# Altium PCB 搅拌杯PCB.PcbDoc
Units mil, origin at the board's own origin, x right, y up, seen from the top; angles counter-clockwise.
Board outline 1417.32 x 1279.53 mil, 2 copper layers (Top Layer, Bottom Layer); 74 components, 45 nets, 179 pads, 40 vias.
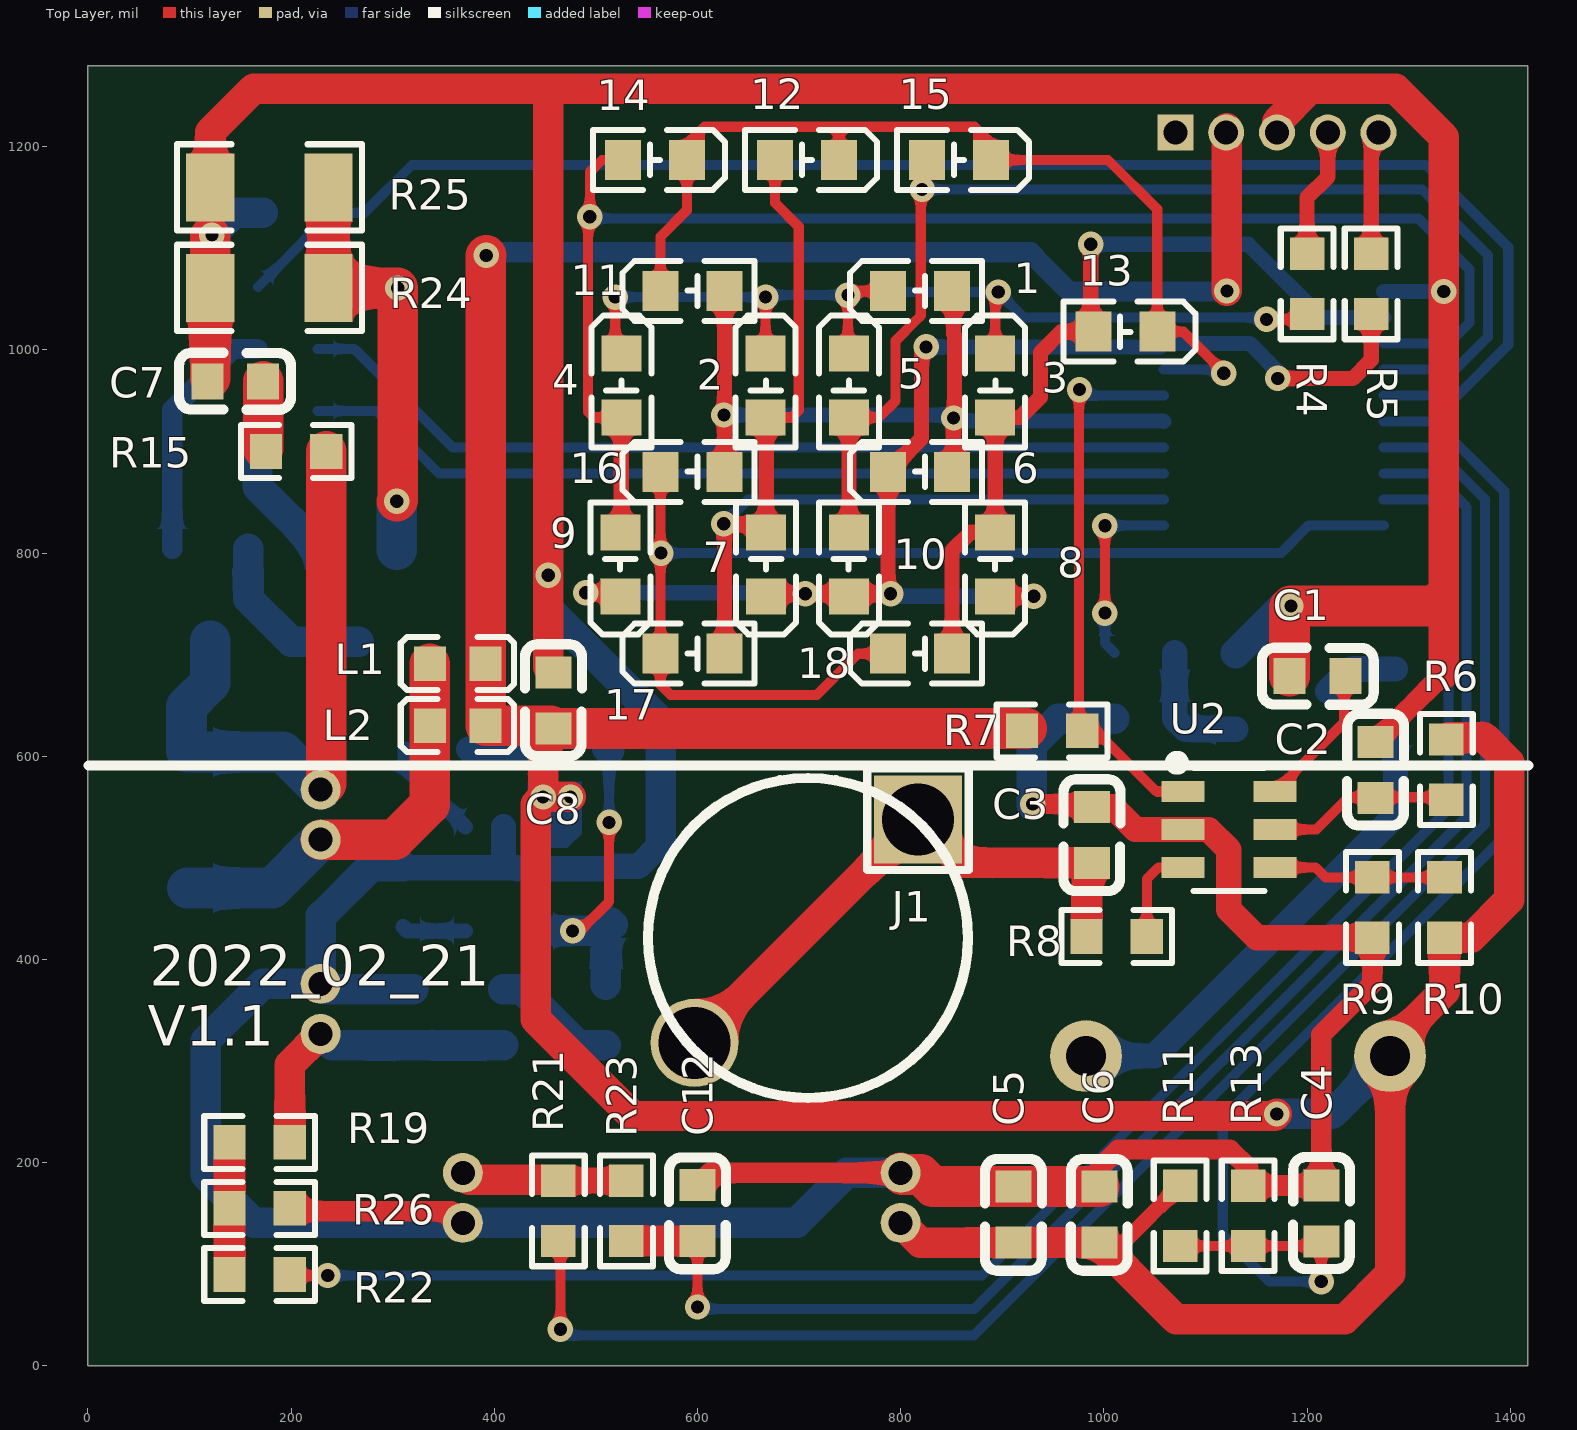
[diagram p0: Top Layer view]
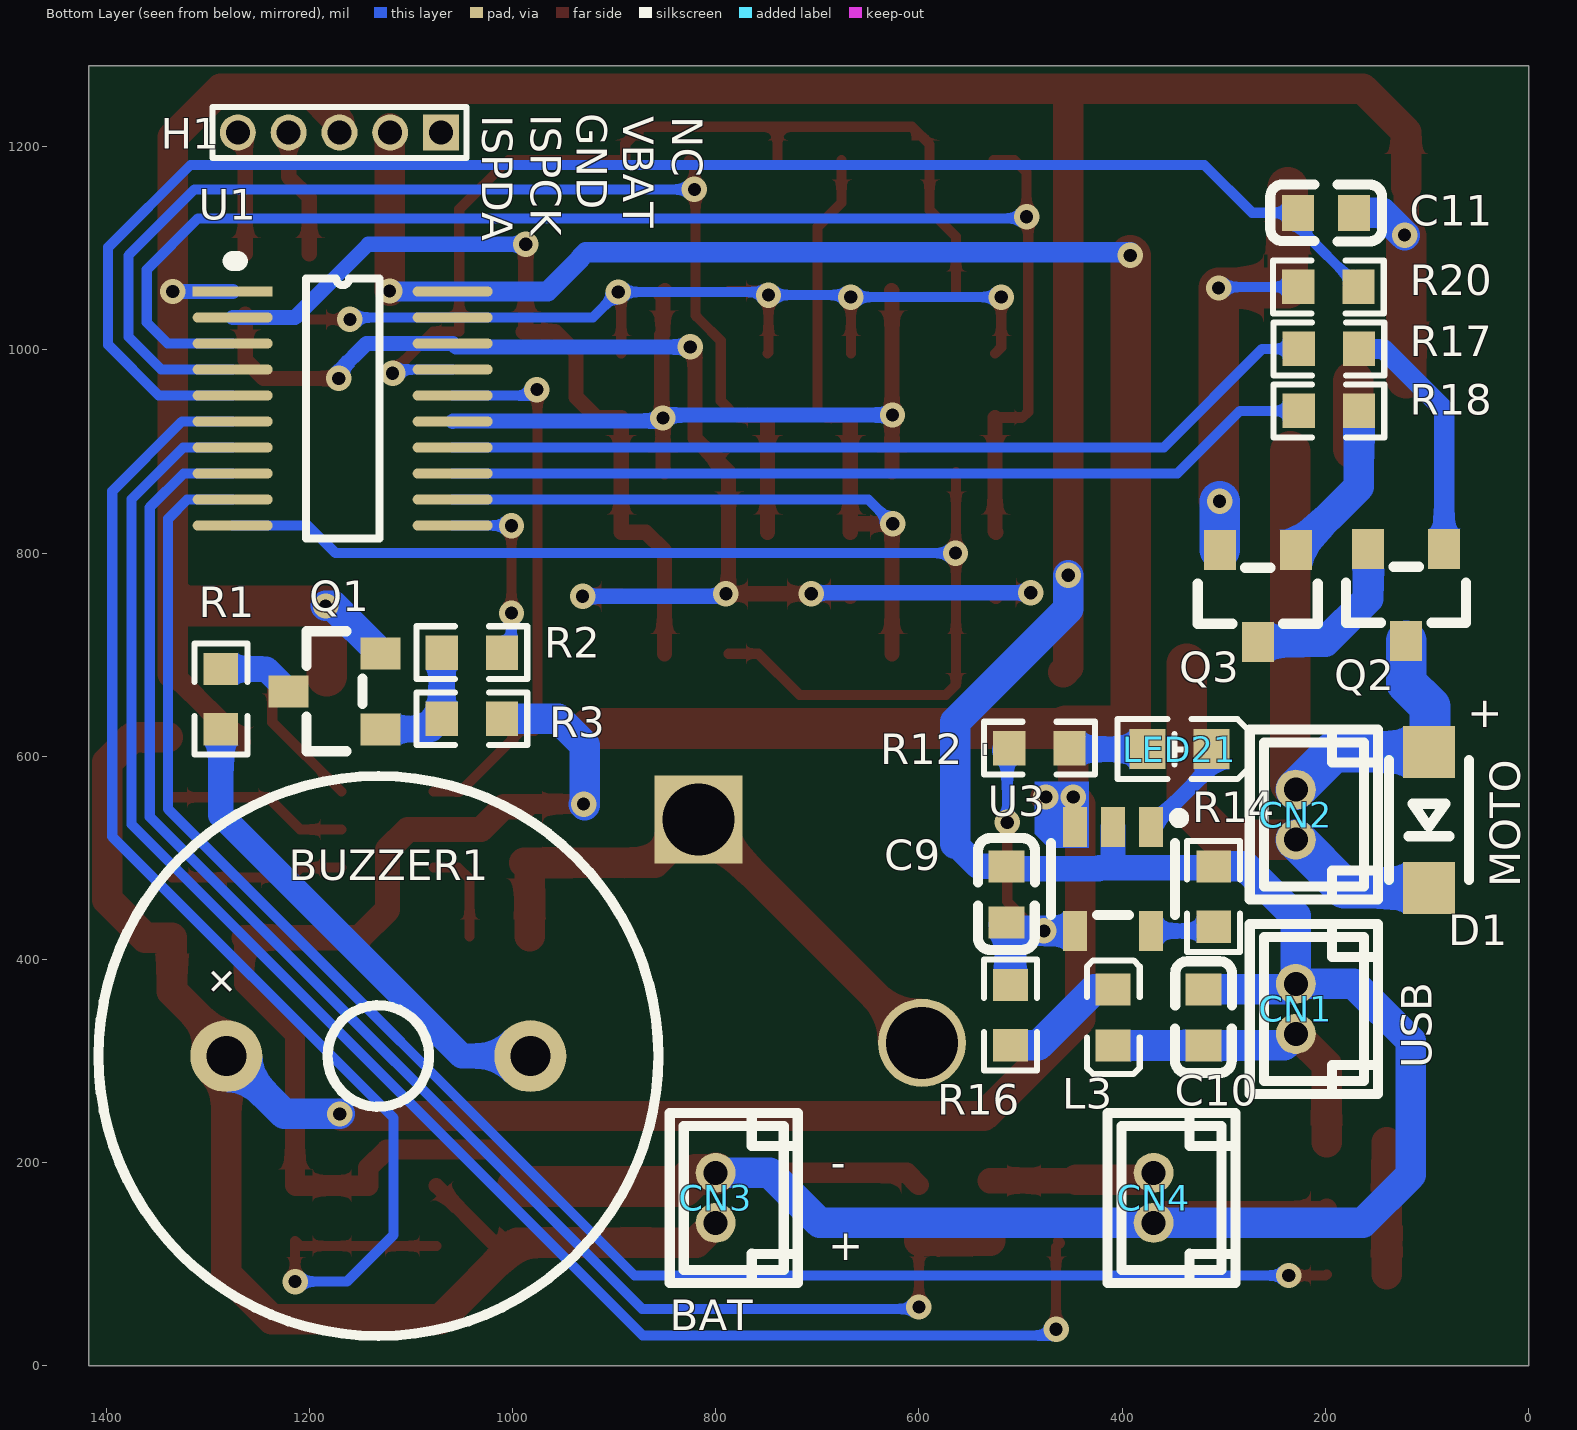
[diagram p1: Bottom Layer view, seen from below]

## Layer stack, top to bottom
Top Solder: solder mask 0.4, Solder Resist, Dk 3.5
Top Layer: signal copper 1.4
Dielectric 1: dielectric 12.6, FR-4, Dk 4.8
Bottom Layer: signal copper 1.4
Bottom Solder: solder mask 0.4, Solder Resist, Dk 3.5

## Board outline
0,0 0,1279.53 1417.32,1279.53 1417.32,0

## Design rules (kind name [scope] priority, off if disabled: settings)
Clearance [All] p1: gap=8
ComponentClearance [All] p1 off: gap=10 collisioncheckmode=3 verticalgap=10 showdistances=FALSE
PolygonConnect [All] p1: connectstyle=Relief reliefconductorwidth=10 reliefentries=4 polygonreliefangle="90 Angle" airgapwidth=10
RoutingVias [All] p1: holewidth=28 width=50 viastyle="Through Hole" minholewidth=10 minwidth=10 maxholewidth=28 maxwidth=50
SolderMaskExpansion [All] p1: expansion=4
Width [All] p1: maxlimit=50 minlimit=8 preferedwidth=10
29 further rules are at their usual default settings.

## Components (designator, comment, footprint, x,y, rotation, side; value= is the part's Value field where it differs from the comment)
1 "LED-0603_W" LED0603-FD_WHITE 819,1058 r180 top (schematic designator LED1)
2 "LED-0603_W" LED0603-FD_WHITE 667,965 r90 top (schematic designator LED2)
3 "LED-0603_W" LED0603-FD_WHITE 893,965 r90 top (schematic designator LED3)
4 "LED-0603_W" LED0603-FD_WHITE 525,965 r90 top (schematic designator LED4)
5 "LED-0603_W" LED0603-FD_WHITE 749,965 r90 top (schematic designator LED5)
6 "LED-0603_W" LED0603-FD_WHITE 819,880 r180 top (schematic designator LED6)
7 "LED-0603_W" LED0603-FD_WHITE 667.53,789 r270 top (schematic designator LED7)
8 "LED-0603_W" LED0603-FD_WHITE 893,789 r270 top (schematic designator LED8)
9 "LED-0603_W" LED0603-FD_WHITE 524,789 r270 top (schematic designator LED9)
10 "LED-0603_W" LED0603-FD_WHITE 749,789 r270 top (schematic designator LED10)
11 "LED-0603_W" LED0603-FD_WHITE 595,1058 r180 top (schematic designator LED11)
12 "LED-0603_W" LED0603-FD_WHITE 707.75,1187 r0 top (schematic designator LED12)
13 "LED-0603_W" LED0603-FD_WHITE 1021,1018 r0 top (schematic designator LED13)
14 "LED-0603_W" LED0603-FD_WHITE 558,1187 r0 top (schematic designator LED14)
15 "LED-0603_W" LED0603-FD_WHITE 857.51,1187 r0 top (schematic designator LED15)
16 "LED-0603_W" LED0603-FD_WHITE 595,880 r180 top (schematic designator LED16)
17 "LED-0603_W" LED0603-FD_WHITE 595,701 r180 top (schematic designator LED17)
18 "LED-0603_W" LED0603-FD_WHITE 819,701 r180 top (schematic designator LED18)
BUZZER1 "FMQ-BUZZER2" BUZ-TH_BD12.0-P7.60-D0.6-FD 1132,305 r180 bottom
C1 "4.7nF" C0603 1210.24,678.92 r180 top
C2 "0.1u" C0603 1267.24,586.54 r270 top
C3 "nc" C0603 988.22,522.69 r90 top
C4 "0.1u" C0603 1214,150.23 r270 top
C5 "1uF" C0603 911,149 r90 top
C6 "0.1u" C0603 995.5,149 r90 top
C7 "0.1u" C0603 145,969 r0 top
C8 "10uF" C0603 458,655 r270 top
C9 "4.7uF" C0603 514,464.19 r270 bottom
C10 "10uF" C0603 320,343 r270 bottom
C11 "0.1u" C0603 199.44,1135 r0 bottom
C12 "0.1u" C0603 600,150.44 r90 top
CN1 "0530470210" CONN-TH_0530470210 229,351.39 r90 bottom
CN2 "0530470210" CONN-TH_0530470210 229,542.61 r90 bottom
CN3 "0530470210" CONN-TH_0530470210 800,165.39 r90 bottom
CN4 "0530470210" CONN-TH_0530470210 369,165.39 r90 bottom
D1 "1N4148W" SOD-123FL_L2.6-W1.6-LS3.4-RD 98,537.33 r270 bottom
H1 "HDR-F-2.54_1x5" 1.27mm_5PIN 1070.34,1214 r0 bottom
J1 "HDR-M-2.54_1x1" HDR-M-2.54_1X1 817,538 r0 top
L1 "22uH" L0603 364,691 r0 top
L2 "22uH" L0603 364,629.97 r0 top
L3 "BEAD" L0603 409,343 r270 bottom
LED21 "LED-0603_W" LED0603-FD_WHITE 343.5,607 r180 bottom
Q1 "2N7002" SOT-23_L2.9-W1.3-P0.95-LS2.4-BR 1175.07,664.01 r180 bottom
Q2 "2N7002" SOT-23_L2.9-W1.3-P0.95-LS2.4-BR 120.43,759 r90 bottom
Q3 "2N7002" SOT-23_L2.9-W1.3-P0.95-LS2.4-BR 266.43,758 r90 bottom
R1 "100R" R0603 1287,656.35 r90 bottom
R2 "1K" R0603 1040.07,702.01 r180 bottom
R3 "100K" R0603 1040.07,637.01 r180 bottom
R4 "100R" R0603 1200,1065 r270 top
R5 "100R" R0603 1263,1065 r270 top
R6 "0R" R0603 1337,587 r90 top
R7 "10K" R0603 949,625 r180 top
R8 "1K" R0603 1012.58,422.69 r180 top
R9 "NC" R0603 1264.24,451.21 r90 top
R10 "NC" R0603 1335.24,451.21 r90 top
R11 "3M" R0603 1075,147.69 r90 top
R12 "1k" R0603 481.35,608 r180 bottom
R13 "1M" R0603 1142,147.79 r270 top
R14 "1k" R0603 310,462 r90 bottom
R15 "1k" R0603 205,900 r0 top
R16 "NC" R0603 509.84,345.35 r270 bottom
R17 "100R" R0603 196.55,1001 r180 bottom
R18 "100R" R0603 196.55,940 r180 bottom
R19 "1k" R0603 169,220 r0 top
R20 "1k" R0603 197,1062 r180 bottom
R21 "330K" R0603 463,152.64 r90 top
R22 "1k" R0603 169,90 r0 top
R23 "1k" R0603 530,152.64 r270 top
R24 "1R" R1206 178.65,1061 r0 top
R25 "1R" R1206 178.65,1160 r0 top
R26 "33K" R0603 169,155 r0 top
U1 "ES7P0693FHTF" TSOP20 1275.4,1057.54 r180 bottom
U2 "AS01C(AI01)" SOT-23-6_L2.9-W1.6-P0.95-LS2.8-BL 1123.11,528 r270 top
U3 "HE4054B" SOT-23-5_L3.0-W1.7-P0.95-LS2.8-BR 409,479.34 r90 bottom

## Footprints (in the part's own frame and the unit in brackets; to place one, negate y for a bottom-side part, rotate by r counter-clockwise, add the part's x,y. Pads: shape width x height; smd on the part's side, far side on the other; paste and mask are expansions set on the pad)
1.27mm_5PIN [mm]
  rect 0.9x0.9 hole 0.6: 1(0,0)
  round 0.9 hole 0.6: 2(1.27,0) 3(2.54,0) 4(3.81,0) 5(5.08,0)
  silkscreen extent -0.64,-0.64 5.71,0.64
BUZ-TH_BD12.0-P7.60-D0.6-FD [mm]
  round 1.8 hole 1: 1(-3.8,0) 2(3.8,0)
  silkscreen extent -7,-7 7,7
C0603 [mm]
  rect 0.8x0.9 smd: 1(-0.7,0) 2(0.7,0)
  silkscreen extent -1.41,-0.71 1.39,0.72
CONN-TH_0530470210 [mm]
  round 1 hole 0.6: 1(-0.625,0) 2(0.625,0)
  silkscreen extent -2.13,-2.05 2.13,1.15
HDR-M-2.54_1X1 [mm]
  rect 2.2x2.2 hole 1.8: 1(0,0)
  silkscreen extent -1.27,-1.27 1.27,1.27
L0603 [mm]
  rect 0.8x0.864 smd: 1(-0.7,0) 2(0.7,0)
  silkscreen extent -1.42,-0.65 1.41,0.67
LED0603-FD_WHITE [mm]
  rect 0.9x1 smd: 1(-0.8,0) 2(0.8,0)
  silkscreen extent -1.55,-0.75 1.75,0.75
R0603 [mil]
  rect 31.75x34.02 smd: 1(-29.65,0) 2(29.65,0)
  silkscreen extent -55,-26 55,26
R1206 [mil]
  rect 47.54x66.97 smd: 1(-58.22,0) 2(58.22,0)
  silkscreen extent -91,-42 91,42
SOD-123FL_L2.6-W1.6-LS3.4-RD [mm]
  rect 1.3x1.3 smd: 1(1.7,0) 2(-1.7,0)
  silkscreen extent -1.5,-1 1.5,1
SOT-23-5_L3.0-W1.7-P0.95-LS2.8-BR [mm]
  rect 1x0.6 smd: 1(1.3,-0.95) 2(1.3,0) 3(1.3,0.95) 4(-1.3,0.95) 5(-1.3,-0.95)
  silkscreen extent -0.9,-1.78 1.65,1.55
SOT-23-6_L2.9-W1.6-P0.95-LS2.8-BL [mm]
  rect 0.532x1.072 smd: 1(-0.95,-1.149) 2(0,-1.149) 3(0.95,-1.149) 4(0.95,1.149) 5(0,1.149) 6(-0.95,1.149)
  silkscreen extent -1.82,-1.45 1.54,0.89
SOT-23_L2.9-W1.3-P0.95-LS2.4-BR [mm]
  rect 1x0.8 smd: 1(1.15,-0.95) 2(1.15,0.95) 3(-1.15,0)
  silkscreen extent -0.7,-1.5 0.7,1.5
TSOP20 [mm]
  rect 2x0.25 smd: 1(0,0)
  oval 2x0.25 smd: 2(0,-0.65) 3(0,-1.3) 4(0,-1.95) 5(0,-2.6) 6(0,-3.25) 7(0,-3.9) 8(0,-4.55) 9(0,-5.2) 10(0,-5.85) 11(5.5,-5.85) 12(5.5,-5.2) 13(5.5,-4.55) 14(5.5,-3.9) 15(5.5,-3.25) 16(5.5,-2.6) 17(5.5,-1.95) 18(5.5,-1.3) 19(5.5,-0.65) 20(5.5,0)
  silkscreen extent 0,-6.18 3.66,0.76

## Part data
L3: library part 22uH
R3: library part 1K
R6 R7: library part NC
R11: library part 430k
R13: library part 430K
R21: library part 33K

## Free pads (board coordinates)
  round 86.61 hole 70.87: 0(597,318)

## Via types
v1: diameter 25, hole 13, Top Layer to Bottom Layer, tented both sides, 40 vias

## Nets (pads, with @x,y where several pads share a name; then routed paths per layer and width w, separated by ;. In a path a pad name is that pad's centre, name@x,y a point inside that pad or via, vN(x,y) a via of type N, cw(c..) or ccw(c..) an arc to the next point about the centre after c; other vN are vias at no path point)
BUZZER: R2.2 U1.11 | length 186.8
  Top Layer w10: v1(1001,741) v1(1001,827)
  Bottom Layer w10: v1(1001,741) 1001,711.42 R2.2 ; v1(1001,827) 1001.22,827.22 U1.11
GND: C1.2 C2.1 C3.2 C4.1 C5.2 C6.2 C7.1 C8.1 C9.1 C10.1 C11.1 C12.2 CN1.2 CN3.2 CN4.1 H1.3 Q1.2 R3.2 R9.1 R13.1 R14.2 R24.1 R25.1 R26.2 U1.1 U2.2 U3.2 | length 6715.9
  Top Layer w20: R26.2 198.65,152.32 357.46,152.32 CN4.1 ; C12.2 612,190 CN3.2 ; v1(930,553) 985.46,553 C3.2 ; C6.2 995.5,194.5 1014,213 1124,213 1142,195 R13.1 1213.66,177.44 C4.1 1214,326 1264.24,376.24 R9.1 ; C2.1 1334.46,681.32
  Top Layer w25: C7.1 C7.1@120.43,971.99 ; v1@120.43,1113 R25.1 ; C3.2 1008.76,550.24 1031,528 U2.2 1103,528 1123,508 1123,449 1150.44,421.56 R9.1
  Top Layer w30: R25.1 120.43,1214.43 163,1257 1203,1257 ; 453,1256 v1(453,778.2) 453,687.56 C8.1 ; H1.3 1170.34,1224.34 1203,1257 ; 1329,752 1334.46,752 ; 1334.46,681.32 1334.46,752 ; 1203,1257 1287,1257 1334.46,1209.54 v1(1334.46,1057.54) 1334.46,752
  Top Layer w40: C7.1@120.43,971.99 R24.1 v1@120.43,1112 ; CN3.2 801.54,188.46 819.75,188.46 831.66,176.56 C6.2 ; C1.2 1182.68,746.68 v1(1184,748) 1325,748 1329,752
  Bottom Layer w15: U1.1 v1(1334.46,1057.54)
  Bottom Layer w25: R14.2@310,490.33 422.35,490.33 423.18,489.5 511.75,489.5 C9.1 541.75,491.75 564,514 ; 409,502 U3.2
  Bottom Layer w30: v1(122,1113) 144,1135 C11.1 ; R14.2 278.65,491.65 230,443 229,443 CN1.2 ; C10.1 234.44,370.56 CN1.2 ; v1(453,778.2) 453,745 564,634 564,514 ; CN3.2 747,190 697.78,140.78 CN4.1 163.22,140.78 116,188 116,320 172,376 CN1.2 ; v1(930,553) 929,552 929,611 955.01,637.01 R3.2 ; Q1.2 1176.38,748 v1(1184,748)
IO_OUT: R21.1 U1.7 | length 1651
  Top Layer w10: R21.1 461,120.98 465,116.98 v1(465,36)
  Bottom Layer w10: v1(465,36) 471,30 871.91,30 1375,533.09 1375,853 1324,904 U1.7
ISPCK: H1.4 R4.1 | length 127.8
  Top Layer w15: R4.1 1200,1150 1220.34,1170.34 H1.4
ISPDA: H1.5 R5.1 | length 122.4
  Top Layer w15: R5.1 1263,1206.66 H1.5
LED_IO_0: 1.2 2.2 3.2 4.2 5.2 R4.2 U1.19 | length 980.3
  Top Layer w10: v1(519,1052) 519,1002.49 4.2 ; 2.2 v1(667,1052) ; 5.2 748,997.49 v1(748,1054) 752,1058 1.2 ; 3.2 893,1054 v1(896,1057) ; v1(1160,1030) 1202.98,1030 R4.2@1204.93,1031.95
  Bottom Layer w10: v1(519,1052) v1(667,1052) 669,1054 v1(748,1054) 745,1057 v1(896,1057) 921.05,1031.95 U1.19 1158.05,1031.95 v1(1160,1030)
LED_IO_1: 6.2 7.2 8.2 9.2 10.2 R5.2 U1.18 | length 1333.8
  Top Layer w15: v1(490,761) 525.49,761 526.49,760 9.2 ; 7.2 670.02,760 v1(706,760) v1@787.51,760 ; 6.2 v1@787.51,760 ; 6.2@789,881.49 820.5,912.99 820.5,999.5 822,998 826,1002 v1(825,1003) ; v1(790,760) v1@787.51,760 ; 8.2 v1(931,757.51) ; v1(1171,972) 1245,972 1263,990 R5.2
  Bottom Layer w15: v1(490,761) 705,761 v1(706,760) ; v1(790,760) 792.49,757.51 v1(931,757.51) ; v1@823.36,1003.08 824.28,1004 825,1003.28 v1(825,1003) 1055.5,1003 U1.18 1143.64,1006.36 1171,979 v1(1171,972)
LED_IO_2: 11.2 12.2 13.2 14.2 15.2 U1.17 | length 963.6
  Top Layer w10: 11.2 563.51,1111.51 589.49,1137.49 14.2 589.49,1202.18 607,1219.69 739.25,1219.69 ; 12.2 739.25,1219.69 ; v1(1118,977) 1118,978 1078,1018 13.2 1052.49,1138.51 1004,1187 15.2 889,1203 872.31,1219.69 739.25,1219.69
  Bottom Layer w10: U1.17 v1@1118,980.77
LED_IO_3: 16.2 17.2 18.2 U1.10 | length 1177.1
  Top Layer w10: 16.2 17.2 563.51,670.49 573.56,660.44 717.44,660.44 758,701 18.2
  Bottom Layer w10: v1(564,800) 1174,800 1201.22,827.22 U1.10
LED_IO_4: 1.1 6.1 11.1 16.1 U1.15 | length 808.2
  Top Layer w15: 16.1 11.1 11.1@627,1058.5 ; 1.1@850,1058.5 1.1 854,1054.5 852,1052.5 852,1015.6 853,1014.6 853,934 v1(852,933) ; 6.1 852,881.5 v1(852,933) ; v1@852,935 v1(852,933)
  Bottom Layer w15: v1(626,936) v1@852,936 ; v1(852,933) v1@852,936 ; U1.15 1058.45,930 851,930 849,932 849,933 v1@852,936
LED_IO_5: 2.1 7.1 12.1 17.1 U1.12 | length 1009.1
  Top Layer w10: 2.1 692.5,933.5 699.68,940.68 699.68,1121.32 676.26,1144.74 12.1
  Top Layer w15: v1(625.82,828.82) v1@626.5,828.82 ; 17.1 v1@626.5,828.82 ; 7.1@659.21,828.82 v1@626.5,828.82 ; 2.1 667.53,932.97 7.1
  Bottom Layer w10: v1(625.82,828.82) 649.82,852.82 U1.12
LED_IO_6: 3.1 8.1 13.1 18.1 U1.2 | length 826
  Top Layer w15: 18.1 850.5,802.5 868.5,820.5 8.1 3.1 917.5,933.5 937.5,953.5 937.5,997.5 958,1018 13.1@987,1018 ; v1(987,1104) 13.1@987,1018 ; 13.1 13.1@987,1018
  Bottom Layer w15: v1(987,1104) 1142,1104 1214.05,1031.95 U1.2
LED_IO_7: 4.1 9.1 14.1 U1.3 | length 1461.8
  Top Layer w10: 4.1 498,933.5 492.31,939.19 492.31,1129.31 v1(494,1131) 494,1175 506,1187 14.1
  Top Layer w15: 9.1 525,821.49 4.1
  Bottom Layer w10: v1@490,1130 491,1131 v1(494,1131) ; v1@493.31,1133 494,1132.31 v1(494,1131) ; U1.3 1339.36,1006.36 1359.96,1026.96 1359.96,1079.04 1309.5,1129.5 495.5,1129.5 v1(494,1131)
LED_IO_8: 5.1 10.1 15.1 U1.4 | length 1195.6
  Top Layer w10: 5.1 778.5,933.5 795,950 795,1009.06 815.44,1029.5 815.5,1029.5 819.78,1033.78 819.78,1156.78 v1(821,1158) 821,1181.99 15.1
  Top Layer w15: 10.1 5.1
  Bottom Layer w10: v1(821,1158) 1313,1158 1377.96,1093.04 1377.96,1012.96 1345.77,980.77 U1.4
MOTO_CONTROL_A: R17.1 U1.14 | length 872.8
  Bottom Layer w10: R17.1 262,1001 359,904 U1.14
MOTO_CONTROL_B: R18.1 U1.13 | length 858.2
  Bottom Layer w10: R18.1 284,940 345.59,878.41 U1.13
MOTO_CURRERN: C11.2 R20.2 U1.5 | length 1561
  Bottom Layer w10: R20.2 227,1121.66 C11.2 272,1135 319,1182 1317,1182 1398,1101 1398,1005 1348.18,955.18 U1.5
NetBUZZER1_2: BUZZER1.2 R1.1 | length 487.5
  Bottom Layer w25: BUZZER1.2 1050,305 1287,542 R1.1
NetC1_1: C1.1 U2.6 | length 143
  Top Layer w10: U2.6 1236.52,633.58 1236.52,678.92 C1.1
NetC2_2: C2.2 R6.1 U2.5 | length 184
  Top Layer w10: U2.5 1209,528 1240.69,559.69 R6.1@1339.24,559.69
NetC3_1: C3.1 J1.1 pad.0 R8.2 | length 574.7
  Top Layer w30: pad.0 J1.1 859.87,495.13 C3.1 982.93,489.84 R8.2
NetC7_2: C7.2 R15.1 | length 70.2
  Top Layer w30: R15.1@172.56,902.79 R15.1
  Top Layer w40: R15.1@172.56,902.79 C7.2
NetC9_2: C9.2 R12.1 R16.1 U3.4 | length 328.8
  Top Layer w10: v1(477,428.16) 484.16,428.16 513,457 v1(513,535)
  Bottom Layer w10: v1(513,535) R12.1@513,606
  Bottom Layer w30: U3.4@455,428.16 v1(477,428.16) 505.52,428.16 C9.2@509.84,432.48 ; R16.1 C9.2@509.84,432.48 ; R12.1 R12.1@513,606 ; C9.2@509.84,432.48 C9.2@511.36,434 ; C9.2@511.36,434 516.64,434 C9.2 C9.2@511.36,434
NetCN2_1: CN2.1 D1.1 L1.1 L2.1 | length 411
  Top Layer w40: CN2.1 302,518 336.44,552.44 L2.1 L1.1
  Bottom Layer w40: D1.1 181.4,470.4 CN2.1
NetCN2_2: CN2.2 D1.2 Q2.3 R15.2 | length 601.1
  Top Layer w30: CN2.2 CN2.2@234.65,572.88
  Top Layer w40: CN2.2@234.65,572.88 R15.2
  Bottom Layer w40: Q2.3 120.43,672.43 97,649 97,605.26 D1.2 191.96,604.26 CN2.2
NetCN4_2: CN4.2 R21.2 R23.1 | length 164.2
  Top Layer w25: 445,183.46 446.17,182.29 R21.2 R23.1
  Top Layer w30: CN4.2 375.54,183.46 445,183.46
NetL3_1: L3.1 R16.2 | length 123.6
  Bottom Layer w30: L3.1 427.44,370.56 482.31,315.69 R16.2
NetLED21_1: LED21.1 R12.2 | length 77.1
  Bottom Layer w25: LED21.1 450.69,607 R12.2
NetLED21_2: LED21.2 U3.1 | length 101.2
  Bottom Layer w15: LED21.2 312.01,590.11 U3.1
NetQ1_1: Q1.1 R2.1 R3.1 | length 129.4
  Bottom Layer w25: R2.1 R3.1 1080.13,626.6 Q1.1
NetQ1_3: Q1.3 R1.2 | length 75.8
  Bottom Layer w25: Q1.3 1242.34,686 R1.2
NetQ2_1: Q2.1 R17.2 | length 245.5
  Bottom Layer w20: Q2.1 83.03,941.03 143,1001 R17.2
NetQ2_2: Q2.2 Q3.3 | length 175.3
  Bottom Layer w30: Q2.2 157.84,755.16 200.28,712.72 Q3.3
NetQ3_1: Q3.1 R18.2 | length 162.5
  Bottom Layer w30: R18.2 166.9,865.4 Q3.1
NetQ3_2: Q3.2 R20.1 R24.2 R25.2 | length 551.9
  Top Layer w40: R25.2 R24.2 v1(305,1061) 305,852 v1(304,851)
  Bottom Layer w10: R20.1 304,1062 v1(305,1061) ; Q3.2 303.84,850.84 v1(304,851)
  Bottom Layer w40: Q3.2 304,803.44 v1(304,851)
NetR8_1: R8.1 U2.3 | length 96.9
  Top Layer w10: R8.1 1042.24,479.24 1053.6,490.6 U2.3
NetR9_2: R9.2 R10.2 U2.4 | length 170.9
  Top Layer w10: U2.4 1208.4,490.6 1218.13,480.87 R9.2 R10.2
NetR14_1: R14.1 U3.5 | length 63.3
  Bottom Layer w15: R14.1 314.19,428.15 U3.5
NetR19_1: R19.1 R22.1 R26.1 | length 130
  Top Layer w30: R22.1 R26.1 R19.1
NTC_IN: C12.1 R23.2 U1.8 | length 1501.8
  Top Layer w10: C12.1@599.91,122.98 C12.1 v1(600,58)
  Top Layer w30: R23.2 C12.1@599.91,122.98
  Bottom Layer w10: v1(600,58) 600,64 608,56 872.46,56 1357,540.54 1357,845 1323.59,878.41 U1.8
TOUCH_IN: R7.1 U1.16 U2.1 | length 536.1
  Top Layer w10: R7.1@976,634.65 975.5,635.15 975.5,960.5 v1(976,961) ; R7.1 992,625 1051.6,565.4 U2.1
  Bottom Layer w10: v1(976,961) 982,955 1058.68,955 U1.16
USB_CHECK: R22.2 U1.9 | length 1688.3
  Top Layer w10: R22.2 199.65,89 v1(236,89)
  Bottom Layer w10: v1(236,89) 880,89 1339,548 1339,834 1320.19,852.81 U1.9
USB_IN: C10.2 CN1.1 L3.2 R19.2 | length 304
  Top Layer w30: R19.2 198.65,296.43 CN1.1
  Bottom Layer w30: CN1.1 240.34,315.44 C10.2 L3.2
VBAT: BUZZER1.1 C5.1 C6.1 C8.2 CN3.1 H1.2 L1.2 L2.2 R6.2 R7.2 R10.1 R11.2 U1.20 U3.3 | length 4450.7
  Top Layer w15: C6.1 1019.1,121.45 R11.2
  Top Layer w30: C8.2 455.47,629.97 448,622.5 v1(448,560) ; v1(475,560) v1(448,560) ; CN3.1 819.33,121.45 C6.1 1070.95,46 1237,46 1281.61,90.61 BUZZER1.1 1281.61,315.37 1335.24,369 R10.1 1361.56,421.56 1399,459 1399,594 1374,619 R6.2@1339.24,619 ; v1(1121,1058) H1.2@1121,1218 ; v1(1170,248) 1168,246 536,246 441,341 441,553 v1(448,560)
  Top Layer w40: v1(392,1093) 391.56,1092.55 L1.2 L2.2 C8.2@455.47,629.97 ; C8.2 R7.2@923.9,627.44
  Bottom Layer w20: v1@392,1096 928,1096 933,1091 933,1090 965.46,1057.54 U1.20 1120.54,1057.54 v1(1121,1058) ; U3.3 446.4,565.4 449.8,562 448,560.2 v1(448,560)
  Bottom Layer w30: v1(1170,248) 1224.61,248 BUZZER1.1
VBAT_IN: C4.2 R11.1 R13.2 U1.6 | length 1290.4
  Top Layer w10: R11.1 1141.9,118.04 R13.2 1209.45,118.13 C4.2 v1(1214,83)
  Bottom Layer w10: v1(1214,83) 1163,83 1117,129 1117,244 1394,521 1394,861 1325.41,929.59 U1.6
pads on no net: H1.1

## Other copper
Bottom Layer:
  region net VBAT: 486,575 486,524 472,510 433,510 433,575

## Silkscreen, mask and mechanical layers (free items; w line width, h text height)
Top Overlay:
  circle w10: c708.66,421.29 r157.48
  lines w10: 0.57,591.09 1417.89,591.09
  text "2022_02_21" at 61,374 h40
  text "V1.1" at 59,315 h40
Bottom Overlay:
  text "GND" at 937,1233 h30 r90
  text "ISPCK" at 982,1232 h30 r90
  text "ISPDA" at 1030,1231 h30 r90
  text "NC" at 843,1230 h30 r90
  text "VBAT" at 891,1230 h30 r90
  text "+" at 30,624 h30 r270
  text "-" at 523,599 h30 r270
  text "MOTO" at 8,471 h30 r270
  text "USB" at 95,293 h30 r270
  text "-" at 687,185 h30
  text "+" at 689,104 h30
  text "BAT" at 845,35 h30
Mechanical 1:
  the board outline again, w10

## Text inside footprints (layer, text, board x,y; h text height)
BUZZER1: Bottom Overlay "+" at 1289.32,356.82 h30 r315